# Altium PCB PCB_Master_Traffic_Light.PcbDoc
Units mil, origin at the board's own origin, x right, y up, seen from the top; angles counter-clockwise.
Board outline 5500 x 4020 mil, 2 copper layers (Top Layer, Bottom Layer); 46 components, 52 nets, 237 pads, 98 vias.
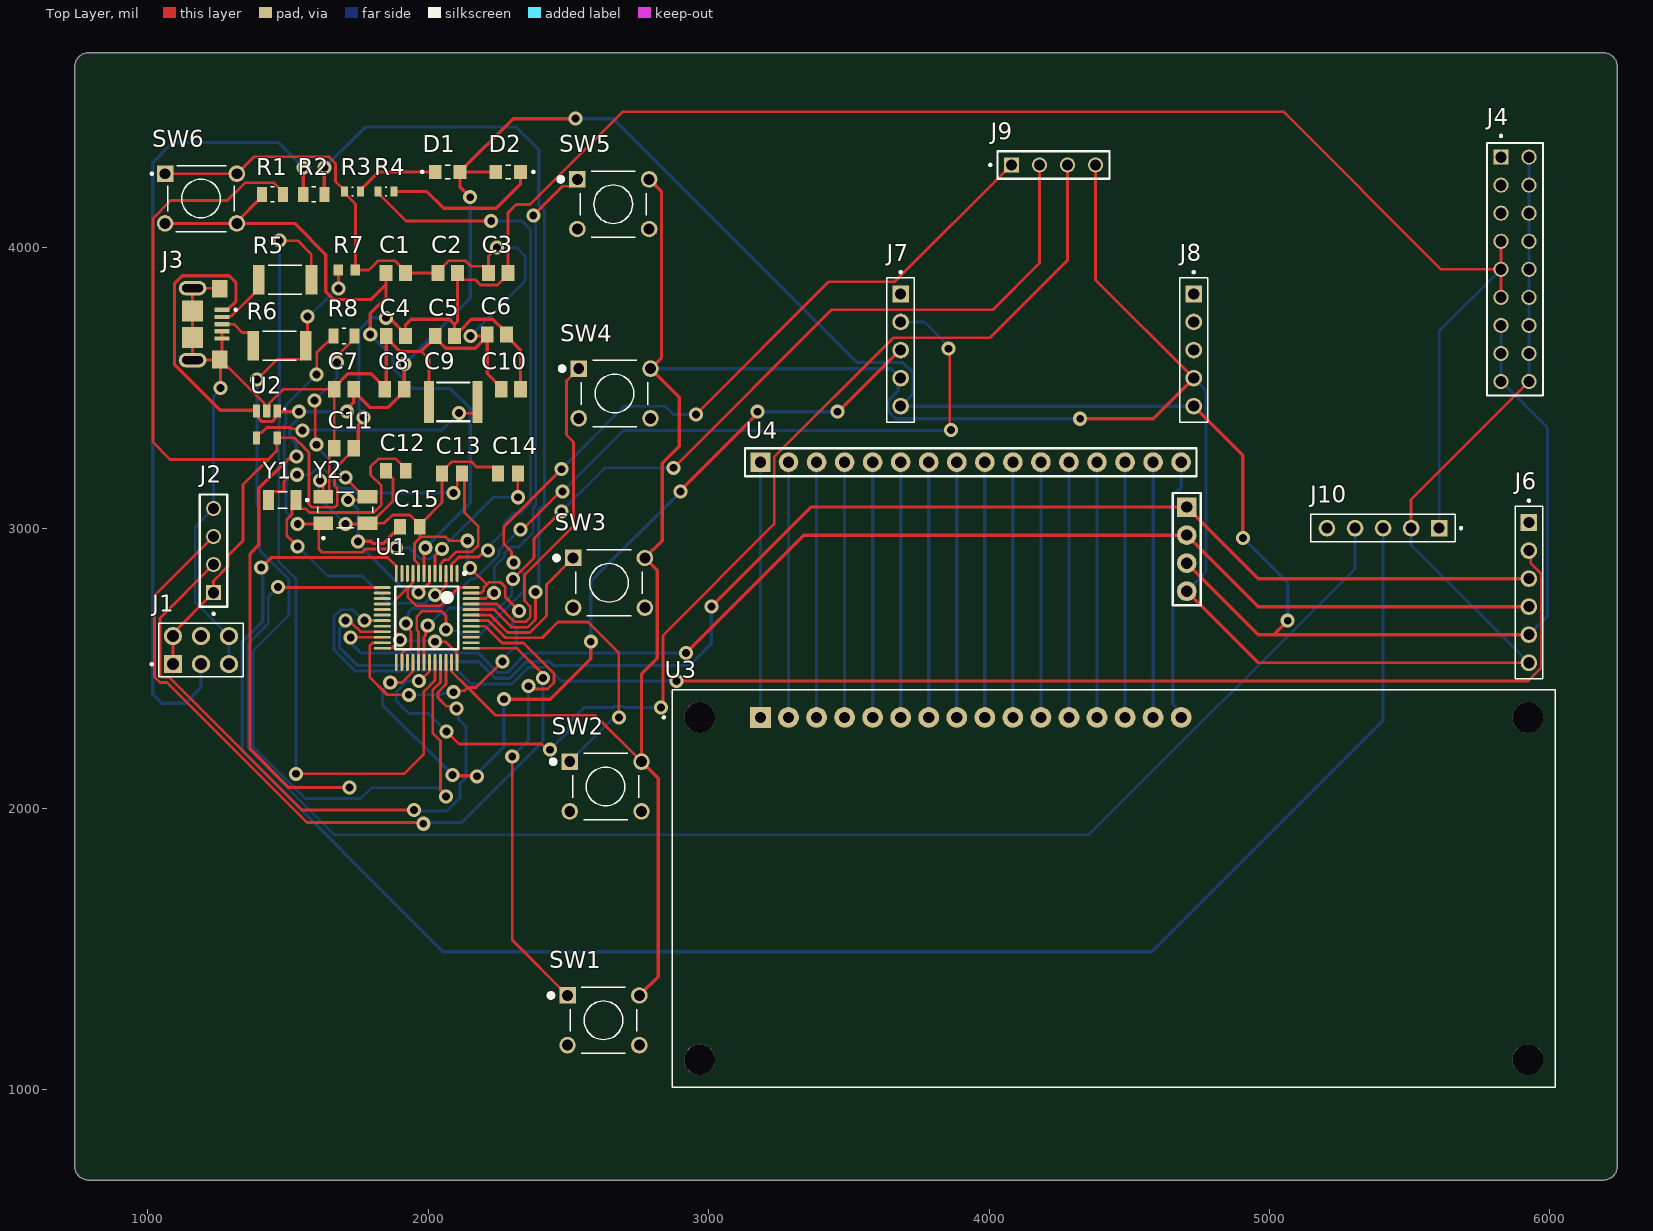
[diagram p0: Top Layer view]
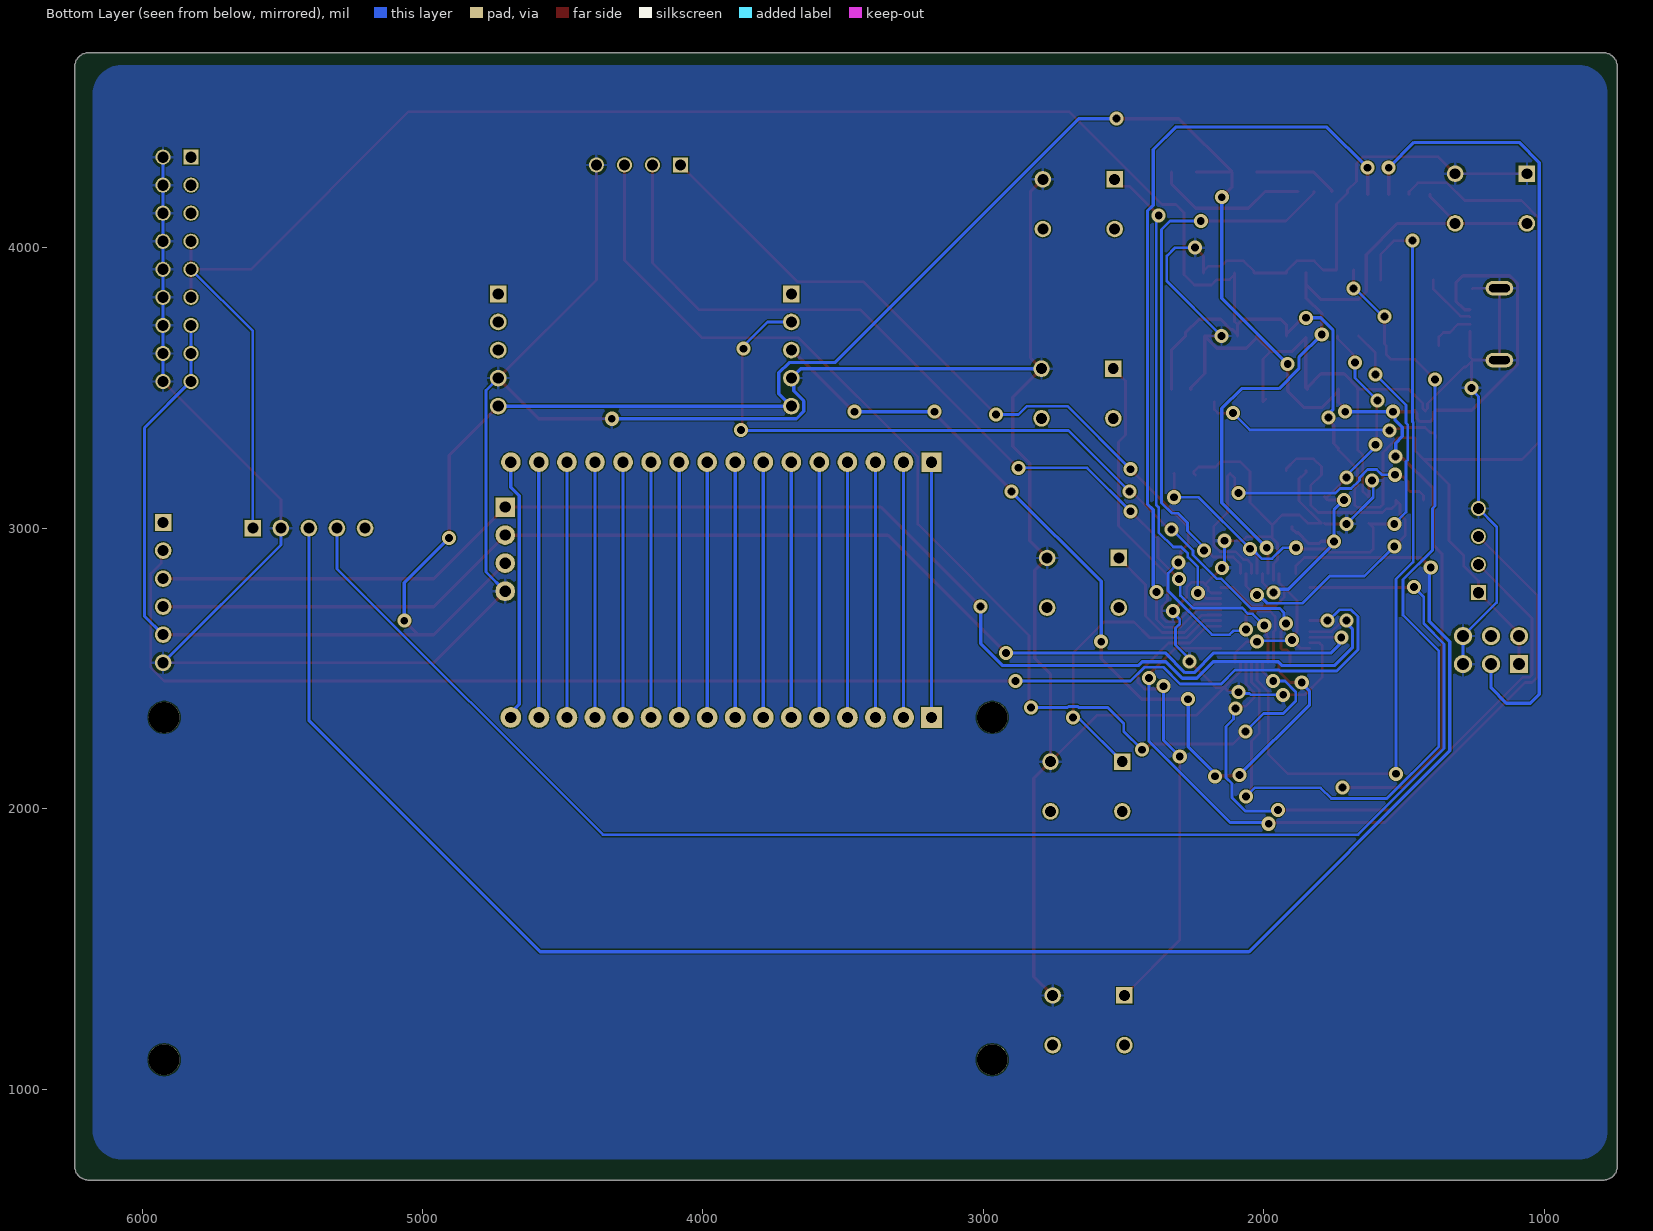
[diagram p1: Bottom Layer view, seen from below]

## Layer stack, top to bottom
Top Solder: solder mask 0.4, Solder Resist, Dk 3.5
Top Layer: signal copper 1.4
Dielectric 1: dielectric 12.6, FR-4, Dk 4.8
Bottom Layer: signal copper 1.4
Bottom Solder: solder mask 0.4, Solder Resist, Dk 3.5

## Board outline
740,725 740,4645 cw(c790,4645) 790,4695 6190,4695 cw(c6190,4645) 6240,4645 6240,725 cw(c6190,725) 6190,675 790,675 cw(c790,725)

## Design rules (kind name [scope] priority, off if disabled: settings)
Clearance [All] p1: gap=3.94 ignorepadtopadclearanceinfootprint=FALSE
PolygonConnect [All] p1: connectstyle=Relief reliefconductorwidth=10 reliefentries=4 polygonreliefangle="90 Angle" airgapwidth=10
RoutingVias [All] p1: holewidth=28 width=50 viastyle="Through Hole" minholewidth=28 minwidth=50 maxholewidth=28 maxwidth=50
SolderMaskExpansion [All] p1: expansion=4 istentingtop=FALSE
SupplyNets "Schematic Supply Nets" [InNet('GND')] p1: voltage=0.000
Width [All] p1: maxlimit=11.81 minlimit=9.06 preferedwidth=9.84 minimp=50.000000 maximp=50.000000 favimp=50.000000
30 further rules are at their usual default settings.

## Components (designator, comment, footprint, x,y, rotation, side; value= is the part's Value field where it differs from the comment)
C1 "1u" CAPC2012X145N 1884.65,3910 r0 top
C2 "100n" CAPC2012X100N#1 2070,3910 r0 top
C3 "100n" CAPC2012X100N#1 2250,3910 r0 top
C4 "100n" CAPC2012X100N#1 1885,3685 r0 top
C5 "100n" CAPC2012X100N#1 2059.65,3685 r0 top
C6 "100n" CAPC2012X100N#1 2245,3690 r0 top
C7 "1u" CAPC2012X145N 1700,3495 r0 top
C8 "100n" CAPC2012X100N#1 1880,3495 r0 top
C9 "22nF" WCAP-CSGP_1812_L4.5W3.2H1.25 2090,3450 r0 top
C10 "10u" CAPC2012X100N#1 2295,3495 r0 top
C11 "100n" CAPC2012X100N#1 1700,3285 r0 top
C12 "20p" CAPC2012X100N#2 1885,3205 r0 top
C13 "20p" CAPC2012X100N#2 2085,3195 r0 top
C14 "20p" CAPC2012X100N#2 2285,3195 r0 top
C15 "20p" CAPC2012X100N#2 1935,3005 r180 top
D1 "7012X1" LED_7012X1 2069.29,4270 r0 top
D2 "7012X1" LED_7012X1 2285,4270 r180 top
J1 "67997-106HLF" AMPHENOL_67997-106HLF 1190,2565 r0 top
J2 "HTSW-104-23-SM-S" SAMTEC_HTSW-104-23-SM-S 1235,2920 r270 top
J3 "2013499-1" TE_2013499-1 1160,3727.24 r270 top
J4 "ASM1117" SAMTEC_MTSW-109-13-G-D-905 5825.52,4322.82 r270 top
J6 "DS3231" HARWIN_M20-7820646 5925,2770 r90 top
J7 "LED1" HARWIN_M20-7820546 3685,3635 r90 top
J8 "LED2" HARWIN_M20-7820546 4730,3635 r90 top
J9 "Traffic Light" SAMTEC_HTSW-104-23-SM-S 4230,4295 r180 top
J10 "HC12" HARWIN_M20-7820546 5405,3000 r0 top
R1 "10k" RESC2012X60N 1445,4190 r180 top
R2 "100k" RESC2012X60N 1592.6,4190 r180 top
R3 "ERJPA3F5100V" RES_ERJPA3F5100V 1730,4200 r180 top
R4 "ERJPA3F5100V" RES_ERJPA3F5100V 1850,4200 r180 top
R5 "20R" RESC5025X120N 1490,3885 r180 top
R6 "20R" RESC5025X120N 1470,3650 r180 top
R7 "4k7" RESC1608X55N 1710,3920 r180 top
R8 "1M" RESC2012X60N 1700,3685 r180 top
SW1 "Button - Normal Mode" SW_FSM8JH 2625,1245 r0 top
SW2 "Button - Heavy Mode" SW_FSM8JH 2632.95,2078.58 r0 top
SW3 "Button - Night Mode" SW_FSM8JH 2645,2805 r0 top
SW4 "Button - Control Mode" SW_FSM8JH 2665,3480 r0 top
SW5 "Button - Control State" SW_FSM8JH 2660,4155 r0 top
SW6 "1825910-6" SW_1825910-6-4 1190,4175 r0 top
U1 "STM32F103C8T6" STM-LQFP48_L 1995,2680 r270 top
U2 "RT9193-33GB" SOT94P279X129-5N 1425,3370 r270 top
U3 "LCD-16X2" MODULE_LCD-16X2 4444.84,1714.76 r0 top
U4 "I2C" PCF8574 3185,3235 r0 top
Y1 "32.768K" XTAL_NX3215SA-32.768K-STD-MUA-14 1480,3100 r180 top
Y2 "8MHz" XTAL_ABM3B-8.000MHZ-10-1-U-T 1705,3065 r90 top

## Footprints (in the part's own frame and the unit in brackets; to place one, negate y for a bottom-side part, rotate by r counter-clockwise, add the part's x,y. Pads: shape width x height; smd on the part's side, far side on the other; paste and mask are expansions set on the pad)
AMPHENOL_67997-106HLF [mm]
  rect 1.65x1.65 hole 1.1: 01(-2.54,-1.27)
  round 1.65 hole 1.1: 02(-2.54,1.27) 03(0,-1.27) 04(0,1.27) 05(2.54,-1.27) 06(2.54,1.27)
  silkscreen extent -4.56,-2.41 3.81,2.41, body extent -3.81,-2.41 3.81,2.41, height 8.38
CAPC2012X100N#1 [mm]
  rect 1.15x1.47 smd: 1(-0.88,0) 2(0.88,0)
  body extent -1,-0.63 1,0.63, height 1
CAPC2012X100N#2 [mm]
  rect 1.08x1.42 smd: 1(-0.895,0) 2(0.895,0)
  body extent -1,-0.63 1,0.63, height 1
CAPC2012X145N [mm]
  rect 1.15x1.47 smd: 1(-0.88,0) 2(0.88,0)
  body extent -1,-0.63 1,0.63, height 1.45
HARWIN_M20-7820546 [mm]
  rect 1.508x1.508 / inner round 1.508 / far side rect 1.508x1.508 hole 1: 1(5.08,0)
  round 1.508 hole 1: 2(2.54,0) 3(0,0) 4(-2.54,0) 5(-5.08,0)
  silkscreen extent -6.55,-1.25 7.16,1.25
HARWIN_M20-7820646 [mm]
  rect 1.508x1.508 / inner round 1.508 / far side rect 1.508x1.508 hole 1: 1(6.35,0)
  round 1.508 hole 1: 2(3.81,0) 3(1.27,0) 4(-1.27,0) 5(-3.81,0) 6(-6.35,0)
  silkscreen extent -7.82,-1.25 8.43,1.25
LED_7012X1 [mm]
  rect 1.15x1.3 smd: A(1.125,0) C(-1.125,0)
  silkscreen extent -2.4,-0.63 0.23,0.63, body extent -0.62,-1 0.62,1, height 0.73
MODULE_LCD-16X2 [mm]
  rect 1.88x1.88 / inner round 1.88 / far side rect 1.88x1.88 hole 1.016: 1(-32,15.5)
  round 1.88 hole 1.016: 2(-29.46,15.5) 3(-26.92,15.5) 4(-24.38,15.5) 5(-21.84,15.5) 6(-19.3,15.5) 7(-16.76,15.5) 8(-14.22,15.5) 9(-11.68,15.5) 10(-9.14,15.5) 11(-6.6,15.5) 12(-4.06,15.5) 13(-1.52,15.5) 14(1.02,15.5) 15(3.56,15.5) 16(6.1,15.5)
  round 2.8 hole 2.8 unplated: ""(-37.5,-15.5) ""(-37.5,15.5) ""(37.5,-15.5) ""(37.5,15.5)
  silkscreen extent -40.85,-18 40,18, body extent -40,-18 40,18, height 10.2
PCF8574 [mil]
  rect 70x70 hole 40: 1(0,0) 17(1520,-160)
  round 70 hole 40: 2(100,0) 3(200,0) 4(300,0) 5(400,0) 6(500,0) 7(600,0) 8(700,0) 9(800,0) 10(900,0) 11(1000,0) 12(1100,0) 13(1200,0) 14(1300,0) 15(1400,0) 16(1500,0) 18(1520,-260) 19(1520,-360) 20(1520,-460)
  silkscreen extent -55,-510 1570,50, body extent -62,-659 1572,50, height 330
RES_ERJPA3F5100V [mm]
  rect 0.65x0.9 smd: 1(-0.725,0) 2(0.725,0)
  silkscreen extent -0.08,-0.4 0.08,0.4, body extent -0.8,-0.4 0.8,0.4, height 0.45
RESC1608X55N [mm]
  rect 0.87x0.97 smd: 1(-0.78,0) 2(0.78,0)
  body extent -0.8,-0.4 0.8,0.4, height 0.55
RESC2012X60N [mm]
  rect 0.92x1.38 smd: 1(-0.955,0) 2(0.955,0)
  silkscreen extent -0.17,-0.68 0.17,0.68, body extent -1,-0.63 1,0.63, height 0.6
RESC5025X120N [mm]
  rect 1.07x2.67 smd: 1(-2.38,0) 2(2.38,0)
  silkscreen extent -1.52,-1.32 1.52,1.32
SAMTEC_HTSW-104-23-SM-S [mm]
  rect 1.37x1.37 / inner round 1.37 / far side rect 1.37x1.37 hole 1.02: 01(3.81,0)
  round 1.37 hole 1.02: 02(1.27,0) 03(-1.27,0) 04(-3.81,0)
  silkscreen extent -5.08,-1.24 5.83,1.24
SAMTEC_MTSW-109-13-G-D-905 [mm]
  rect 1.37x1.37 hole 1.02: 01(0,0)
  round 1.37 hole 1.02: 02(0,2.54) 03(2.54,0) 04(2.54,2.54) 05(5.08,0) 06(5.08,2.54) 07(7.62,0) 08(7.62,2.54) 09(10.16,0) 10(10.16,2.54) 11(12.7,0) 12(12.7,2.54) 13(15.24,0) 14(15.24,2.54) 15(17.78,0) 16(17.78,2.54) 17(20.32,0) 18(20.32,2.54)
  silkscreen extent -2.02,-1.27 21.59,3.81
SOT94P279X129-5N [mm]
  rrect12% 1.17x0.67 smd: 1(-1.22,0.94) 2(-1.22,0) 3(-1.22,-0.94) 4(1.22,-0.94) 5(1.22,0.94)
  silkscreen extent -1.47,1.53 -1.33,1.67, body extent -1.4,-1.45 1.4,1.45, height 1.3
STM-LQFP48_L [mm] "QFP, 48-Leads, Body 7x7mm, Pitch 0.5mm, IPC High Density"
  oval 1.55x0.25 smd: 1(-4.025,2.75) 2(-4.025,2.25) 3(-4.025,1.75) 4(-4.025,1.25) 5(-4.025,0.75) 6(-4.025,0.25) 7(-4.025,-0.25) 8(-4.025,-0.75) 9(-4.025,-1.25) 10(-4.025,-1.75) 11(-4.025,-2.25) 12(-4.025,-2.75) 25(4.025,-2.75) 26(4.025,-2.25) 27(4.025,-1.75) 28(4.025,-1.25) 29(4.025,-0.75) 30(4.025,-0.25) 31(4.025,0.25) 32(4.025,0.75) 33(4.025,1.25) 34(4.025,1.75) 35(4.025,2.25) 36(4.025,2.75)
  oval 0.25x1.55 smd: 13(-2.75,-4.025) 14(-2.25,-4.025) 15(-1.75,-4.025) 16(-1.25,-4.025) 17(-0.75,-4.025) 18(-0.25,-4.025) 19(0.25,-4.025) 20(0.75,-4.025) 21(1.25,-4.025) 22(1.75,-4.025) 23(2.25,-4.025) 24(2.75,-4.025) 37(2.75,4.025) 38(2.25,4.025) 39(1.75,4.025) 40(1.25,4.025) 41(0.75,4.025) 42(0.25,4.025) 43(-0.25,4.025) 44(-0.75,4.025) 45(-1.25,4.025) 46(-1.75,4.025) 47(-2.25,4.025) 48(-2.75,4.025)
  silkscreen extent -4.15,-2.85 2.85,3.55, body extent -3.5,-3.5 3.5,3.5, height 1.6
SW_1825910-6-4 [mm]
  rect 1.498x1.498 / inner round 1.498 / far side rect 1.498x1.498 hole 0.99: 1(-3.25,2.25)
  round 1.498 hole 0.99: 2(3.25,2.25) 3(-3.25,-2.25) 4(3.25,-2.25)
  silkscreen extent -4.54,-3 3,3, body extent -3,-3.9 3,3.9, height 5.01
SW_FSM8JH [mm]
  rect 1.498x1.498 / inner round 1.498 / far side rect 1.498x1.498 hole 0.99: 1(-3.25,2.25)
  round 1.498 hole 0.99: 2(-3.25,-2.25) 3(3.25,2.25) 4(3.25,-2.25)
  silkscreen extent -4.95,-3 3,3, body extent -3,-3.95 3,3.95, height 9.5
TE_2013499-1 [mm]
  rect 0.4x1.35 smd: 1(-1.3,2.675) 2(-0.65,2.675) 3(0,2.675) 4(0.65,2.675) 5(1.3,2.675)
  rect 1.6x1.4 smd: SH1(-3.2,2.45) SH4(3.2,2.45)
  rect 1.9x1.9 smd: SH2(-1.2,0) SH3(1.2,0)
  oval 1.31x2.5 hole 0.71 slot 1.9 at 90 deg: SH5(3.255,0) SH6(-3.255,0)
  silkscreen extent -1.4,3.8 -1.2,4, body extent -4,-2.49 4,3.11, height 2.76
WCAP-CSGP_1812_L4.5W3.2H1.25 [mm] "Ceramic Capacitors, body 4.5x3.2mm"
  rect 0.9x3.8 smd: 1(-2.2,0) 2(2.2,0)
  silkscreen extent -1.45,-1.75 1.45,1.75, body extent -2.25,-1.6 2.25,1.6, height 1.25
XTAL_ABM3B-8.000MHZ-10-1-U-T [mm]
  rect 1.2x1.8 smd: 1(-1.2,2) 2(-1.2,-2) 3(1.2,-2) 4(1.2,2)
  silkscreen extent -2.65,-2.5 1.6,2.5, body extent -1.58,-2.5 1.6,2.5, height 1.1
XTAL_NX3215SA-32.768K-STD-MUA-14 [mm]
  rect 1x1.8 smd: 1(-1.25,0) 2(1.25,0)
  silkscreen extent -2.35,-0.75 0.43,0.75

## Part data
C1 C7: library part C2012X5R1E105K125AA, "1 ÂµF Â±10% 25V Ceramic Capacitor X5R 0805 (2012 Metric)", Package="2012 TDK", Check_prices=https://www.snapeda.com/parts/C2012X5R1E105K125AA/TDK/view-part/?ref=eda, Digi-Key_Part_Number=445-1419-2-ND, MF=TDK, MP=C2012X5R1E105K125AA, SnapEDA_Link=https://www.snapeda.com/parts/C2012X5R1E105K125AA/TDK/view-part/?ref=snap
C2 C3 C4 C5 C6 C8 C11: library part C2012X7R1H104K085AA, "0.1 ÂµF Â±10% 50V Ceramic Capacitor X7R 0805 (2012 Metric)", Package="2012 TDK", Check_prices=https://www.snapeda.com/parts/C2012X7R1H104K085AA/TDK/view-part/?ref=eda, Digi-Key_Part_Number=445-7534-1-ND, MF=TDK, MP=C2012X7R1H104K085AA, Purchase-URL=https://pricing.snapeda.com/search/part/C2012X7R1H104K085AA/?ref=eda, SnapEDA_Link=https://www.snapeda.com/parts/C2012X7R1H104K085AA/TDK/view-part/?ref=snap
C9: library part 885012010015, "WCAP-CSGP Multilayer Ceramic Chip Capacitor, General Purpose, size 1812, NP0, 22nF, 50V", Capacitance Tolerance=+/-5%, Case/Size Code=1812, Insulation Resistance=10GΩ, Manufacturer="Wurth Elektronik", Max Operating Temperature=125°C, Min Operating Temperature=-55°C, Rated Voltage (DC)=50V, Capacitance=22nF, Category="Multilayer Ceramic Chip Capacitors", Ceramic Type=NP0, ComponentLink1Description="Website Link", ComponentLink1URL=https://www.we-online.com/redexpert/article/885012010015?ad, ComponentLink2Description="Datasheet Link", ComponentLink2URL=https://www.we-online.com/redexpert/spec/885012010015?ad, Height=1.25mm, Length=4.5mm, Manufacturer Part Number=885012010015, Match Code=WCAP-CSGP, Mount="Surface Mount", Packaging="Tape and Reel", Q Factor=1000, Technical Reference=NP01812223J050DFCT10000, Width=3.2mm
C10: library part C2012X5R1C106M085AC, "10ÂµF Â±20% 16V Ceramic Capacitor X5R 0805 (2012 Metric)", Package="2012 TDK", Availability="In Stock", Check_prices=https://www.snapeda.com/parts/C2012X5R1C106M085AC/TDK/view-part/?ref=eda, MF=TDK, MP=C2012X5R1C106M085AC, Price=None, Purchase-URL=https://pricing.snapeda.com/search/part/C2012X5R1C106M085AC/?ref=eda, SnapEDA_Link=https://www.snapeda.com/parts/C2012X5R1C106M085AC/TDK/view-part/?ref=snap
C12 C13 C14 C15: library part GQM2195C2E200JB12D, "SMD Capacitor C0G(EIA) with Capacitance: 20pF Tol. 5%. Rated Voltage: 250Vdc", Package="2012 Murata", Availability=Warning, MF=Murata, MP=GQM2195C2E200JB12D, Price=None, Purchase-URL=https://pricing.snapeda.com/search/part/GQM2195C2E200JB12D/?ref=eda, SnapEDA_Link=https://www.snapeda.com/parts/GQM2195C2E200JB12D/Murata/view-part/4378826/?ref=snap
D1 D2: "Red - LED Indication - Discrete 1.7V 0805 (2012 Metric)", Package="0805 Visual Communications", Availability="In Stock", Check_prices=https://www.snapeda.com/parts/7012X1/Visual+Communications/view-part/?ref=eda, MF=VCC, MP=7012X1, Price=None, Purchase-URL=https://pricing.snapeda.com/search/part/7012X1/?ref=eda, SnapEDA_Link=https://www.snapeda.com/parts/7012X1/Visual+Communications/view-part/?ref=snap
J1: "BergStikÂ®, Board to Board connector, Unshrouded vertical header, Through Hole, Double Row, 6 Positions, 2.54 mm (0.100in) Pitch", Package=None, Availability="In Stock", Check_prices=https://www.snapeda.com/parts/67997-106HLF/Amphenol+FCI/view-part/?ref=eda, MF="Amphenol ICC", MP=67997-106HLF, Price=None, Purchase-URL=https://pricing.snapeda.com/search/part/67997-106HLF/?ref=eda, SnapEDA_Link=https://www.snapeda.com/parts/67997-106HLF/Amphenol+FCI/view-part/?ref=snap
J2: "HEADER, 4 CONTACTS, 1 ROW, THROUGH HOLE, 2.54 MM; Connector Systems:Board-to-Board; Pitch Spacing:2.54mm; No. of Rows:1Rows; No. of Contacts:4Contacts; Contact Termination Type:Through Hole; Product Range:HTSW Series; Gender:Header RoHS Compliant: Yes", Package=None, Availability="In Stock", Check_prices=https://www.snapeda.com/parts/HTSW10423SMS/Samtec/view-part/?ref=eda, MF=Samtec, MP=HTSW10423SMS, Price=None, Purchase-URL=https://pricing.snapeda.com/search/part/HTSW10423SMS/?ref=eda, SnapEDA_Link=https://www.snapeda.com/parts/HTSW10423SMS/Samtec/view-part/?ref=snap
J3: Package=None, Availability=Unavailable, MP=2013499-1, Price=None
J4: library part MTSW-109-13-G-D-905, Package=None, Availability=Unavailable, MP=MTSW-109-13-G-D-905, Price=None
J6: library part M20-7820646, Package=None, Availability=Unavailable, MP=M20-7820646, Price=None
J7 J8 J10: library part M20-7820546, Package=None, Availability=Unavailable, MP=M20-7820546, Price=None
J9: library part HTSW-104-23-SM-S, "HEADER, 4 CONTACTS, 1 ROW, THROUGH HOLE, 2.54 MM; Connector Systems:Board-to-Board; Pitch Spacing:2.54mm; No. of Rows:1Rows; No. of Contacts:4Contacts; Contact Termination Type:Through Hole; Product Range:HTSW Series; Gender:Header RoHS Compliant: Yes", Package=None, Availability="In Stock", Check_prices=https://www.snapeda.com/parts/HTSW10423SMS/Samtec/view-part/?ref=eda, MF=Samtec, MP=HTSW10423SMS, Price=None, Purchase-URL=https://pricing.snapeda.com/search/part/HTSW10423SMS/?ref=eda, SnapEDA_Link=https://www.snapeda.com/parts/HTSW10423SMS/Samtec/view-part/?ref=snap
R1: library part RC0805FR-0710KL, "10 kOhms Â±1% 0.125W, 1/8W Chip Resistor 0805 (2012 Metric) Moisture Resistant Thick Film", Package="2012 Rohm Semiconductor", Availability="In Stock", Check_prices=https://www.snapeda.com/parts/RC0805FR-0710KL/Yageo/view-part/?ref=eda, MF=Yageo, MP=RC0805FR-0710KL, Price=None, Purchase-URL=https://pricing.snapeda.com/search/part/RC0805FR-0710KL/?ref=eda, SnapEDA_Link=https://www.snapeda.com/parts/RC0805FR-0710KL/Yageo/view-part/?ref=snap
R2: library part RC0805FR-07100KL, "100 kOhms Â±1% 0.125W, 1/8W Chip Resistor 0805 (2012 Metric) Moisture Resistant Thick Film", Package="2012 Yageo", Check_prices=https://www.snapeda.com/parts/RC0805FR-07100KL/Yageo/view-part/?ref=eda, MF=Yageo, MP=RC0805FR-07100KL, SnapEDA_Link=https://www.snapeda.com/parts/RC0805FR-07100KL/Yageo/view-part/?ref=snap
R3 R4: "RES, THICK FILM, 510R, 1%, 0.25W, 0603", Package="1608-2 Panasonic", Check_prices=https://www.snapeda.com/parts/ERJ-PA3F5100V/Panasonic/view-part/?ref=eda, MF=Panasonic, MP=ERJ-PA3F5100V, SnapEDA_Link=https://www.snapeda.com/parts/ERJ-PA3F5100V/Panasonic/view-part/?ref=snap
R5 R6: library part 3-2176397-2, Package=None, Availability=Unavailable, MP=3-2176397-2, Price=None
R7: library part CRG0603F4K7, "Resistor, Thick Film, Res 4.7 Kilohms, Pwr-Rtg 0.1 W, Tol 1%, SMT, 0603", Package=0603, Power_Rating=".1 W", Resistance=4.7K, Tolerance=1%, Voltage_Rating="50 V", Check_prices=https://www.snapeda.com/parts/CRG0603F4K7/TE+Connectivity+Passive+Product/view-part/?ref=eda, EU_RoHS_Compliance="Compliant with Exemptions", MF="TE Connectivity", MP=CRG0603F4K7, SnapEDA_Link=https://www.snapeda.com/parts/CRG0603F4K7/TE+Connectivity+Passive+Product/view-part/?ref=snap
R8: library part RC0805FR-071ML, "1 MOhms Â±1% 0.125W, 1/8W Chip Resistor 0805 (2012 Metric) Moisture Resistant Thick Film", Package="2012 Yageo", Check_prices=https://www.snapeda.com/parts/RC0805FR-071ML/Yageo/view-part/?ref=eda, MF=Yageo, MP=RC0805FR-071ML, SnapEDA_Link=https://www.snapeda.com/parts/RC0805FR-071ML/Yageo/view-part/?ref=snap
SW1 SW2 SW3 SW4 SW5: library part FSM8JH, "Tactile Switch SPST-NO Top Actuated Through Hole", Package=None, Availability="In Stock", Check_prices=https://www.snapeda.com/parts/FSM8JH/TE+Connectivity+ALCOSWITCH+Switches/view-part/?ref=eda, MF="TE Connectivity", MP=FSM8JH, Price=None, SnapEDA_Link=https://www.snapeda.com/parts/FSM8JH/TE+Connectivity+ALCOSWITCH+Switches/view-part/?ref=snap
SW6: "Switch Push Button OFF (ON) SPST Round Button 0.05A 24VDC Momentary Contact PC Pins Thru-Hole", Package=None, Check_prices=https://www.snapeda.com/parts/1825910-6/TE+Connectivity+ALCOSWITCH+Switches/view-part/?ref=eda, Digi-Key_Part_Number=450-1650-ND, MF="TE Connectivity", MP=1825910-6, Purchase-URL=https://pricing.snapeda.com/search/part/1825910-6/?ref=eda, SnapEDA_Link=https://www.snapeda.com/parts/1825910-6/TE+Connectivity+ALCOSWITCH+Switches/view-part/?ref=snap
U1: library part CMP-0237-00215-3, "ARM Cortex-M3 32-bit MCU, 64 KB Flash, 20 KB Internal RAM, 37 I/Os, 48-pin LQFP, -40 to 85 degC, Tray", I/Os (High Current)=37, Operating Frequency(F) (Processor speed) (MHz)=72, Supply Voltage(Vcc) min (V)=2, A/D Converter="2x12-bit (10 Channel)", ComponentLink1Description="Manufacturer URL", ComponentLink1URL=http://www.st.com/web/en/home.html, ComponentLink2Description=Datasheet, ComponentLink2URL=http://www.st.com/st-web-ui/static/active/en/resource/technical/document/datasheet/CD00161566.pdf, ComponentLink3Description="Package Specification", ComponentLink3URL=http://www.st.com/st-web-ui/static/active/en/resource/technical/document/datasheet/DM00058181.pdf, Core="ARM Cortex-M3", DatasheetVersion="Rev. 16", FLASH Size (Prog) (kB)=64, Internal RAM Size (kB)=20, Mounting Technology="Surface Mount", PackageDescription="48-Pin Low Profile Quad Flat Package, 7 x 7 mm Body, 0.5 mm Pitch", PackageReference=LQFP48, PackageVersion="Rev. 6, 06/2013", Packing=Tray, PartNumber=STM32F103C8T6
U2: "Linear Voltage Regulator IC Positive Fixed 1 Output 300mA TSOT-23-5", Package="SOT-23-5 Richtek", Check_prices=https://www.snapeda.com/parts/RT9193-33GB/Richtek+USA+Inc./view-part/?ref=eda, Digi-Key_Part_Number=1028-1014-2-ND, MF="Richtek USA", MP=RT9193-33GB, Purchase-URL=https://pricing.snapeda.com/search/part/RT9193-33GB/?ref=eda, SnapEDA_Link=https://www.snapeda.com/parts/RT9193-33GB/Richtek+USA+Inc./view-part/?ref=snap
U3: "Display Development Tools 16x2 Black on Green Char LCD w Backlight", Package=None, Check_prices=https://www.snapeda.com/parts/LCD-16X2/Gravitech/view-part/?ref=eda, MF=Gravitech, MP=LCD-16X2, SnapEDA_Link=https://www.snapeda.com/parts/LCD-16X2/Gravitech/view-part/?ref=snap
U4: library part PCF8574
Y1: library part NX3215SA-32.768K-STD-MUA-14, "32.768kHz Â±20ppm Crystal 6pF 70 kOhms 2-SMD, No Lead  MANUFACTURER: NIHON DEMPA KOGYO", Package=None, Availability=Unavailable, MP=NX3215SA-32.768K-STD-MUA-14, Price=None
Y2: library part ABM3B-8.000MHZ-10-1-U-T, "8 MHz Â±10ppm Crystal 10pF 200 Ohms 4-SMD, No Lead", Package="SMD-4 Abracon LLC", Check_prices=https://www.snapeda.com/parts/ABM3B-8.000MHZ-10-1-U-T/Abracon/view-part/?ref=eda, MF=Abracon, MP=ABM3B-8.000MHZ-10-1-U-T, SnapEDA_Link=https://www.snapeda.com/parts/ABM3B-8.000MHZ-10-1-U-T/Abracon/view-part/?ref=snap

## Via types
v1: diameter 50, hole 28, Top Layer to Bottom Layer, 98 vias

## Nets (pads, with @x,y where several pads share a name; then routed paths per layer and width w, separated by ;. In a path a pad name is that pad's centre, name@x,y a point inside that pad or via, vN(x,y) a via of type N, cw(c..) or ccw(c..) an arc to the next point about the centre after c; other vN are vias at no path point)
3V3: U1.9 U1.24 U1.36 U1.48 | length 901.3
  Top Layer w9.84: U1.24 1870.31,2571.73 v1(1899.84,2601.26) 1899.84,2612.13 1881.72,2630.25 1881.72,2741.77 1927.13,2787.18 ; U1.9 1945.79,2805.83 1927.13,2787.18 ; v1(2024.04,2595) 2062.43,2595 2103.27,2554.17 U1.36 ; U1.48 2108.19,2788.27 2042.8,2722.87 1959.15,2722.87 1927.13,2754.89 1927.13,2787.18
  Bottom Layer w9.84: v1(1899.84,2601.26) 1902.97,2598.13 2020.91,2598.13 v1(2024.04,2595)
A: U3.15 U4.15 | length 910
  Bottom Layer w11.81: U3.15 U4.15
BOOT0: R2.1 U1.44 | length 2917.3
  Top Layer w9.84: U1.44 2234.31,2709.53 2296.89,2646.95 2355.64,2646.95 2382.71,2674.02 v1(2382.71,2772.48)
  Top Layer w11.81: v1(1630,4285) 1630,4190.2 R2.1
  Bottom Layer w11.81: v1(1630,4285) 1775,4430 2315,4430 2395,4350 2395,4151.51 2414.96,4131.55 2414.96,3085.12 2395,3065.16 2395,2795.11 2382.71,2782.82 v1(2382.71,2772.48)
DB0: U3.7 U4.7 | length 910
  Bottom Layer w11.81: U3.7 U4.7
DB1: U3.8 U4.8 | length 910
  Bottom Layer w11.81: U3.8 U4.8
DB2: U3.9 U4.9 | length 910
  Bottom Layer w11.81: U3.9 U4.9
DB3: U3.10 U4.10 | length 910
  Bottom Layer w11.81: U3.10 U4.10
DB4: U3.11 U4.11 | length 910
  Bottom Layer w11.81: U3.11 U4.11
DB5: U3.12 U4.12 | length 910
  Bottom Layer w11.81: U3.12 U4.12
DB6: U3.13 U4.13 | length 910
  Bottom Layer w11.81: U3.13 U4.13
DB7: U3.14 U4.14 | length 910
  Bottom Layer w11.81: U3.14 U4.14
E: U3.6 U4.6 | length 910
  Bottom Layer w11.81: U3.6 U4.6
GND: C1.2 C2.1 C3.1 C4.1 C5.1 C6.1 C7.1 C8.1 C9.1 C10.1 C11.1 C12.1 C13.1 C14.1 C15.1 J1.05 J1.06 J2.04 J3.4 J3.5 J3.SH1 J3.SH2 J3.SH3 J3.SH4 J3.SH5 J3.SH6 J4.02 J4.04 J4.06 J4.08 J4.10 J4.12 J4.14 J4.16 J4.18 J6.6 J7.4 J8.4 J9.04 J10.2 R3.2 R7.1 SW1.3 SW2.3 SW3.3 SW4.3 SW5.3 SW6.1 SW6.2 U1.8 U1.23 U1.35 U1.47 U2.2 U4.20 Y2.2 Y2.4 | length 20530.7
  Top Layer w9.84: SW6.1 SW6.2 1378.35,4323.98 1646.14,4323.98 1669.86,4300.26 1669.86,4236.51 1701.46,4204.92 R3.2 1701.46,4195.08 1740.71,4155.83 R7.1 1788.66,3920 1821.57,3952.91 1882.68,3952.91 1919.29,3916.3 C1.2 C2.1 2035.35,3916.3 2071.97,3952.91 2133.07,3952.91 2151.97,3934.02 2197.64,3934.02 C3.1@2215.35,3916.3 ; J3.SH1 1254.29,3855.39 J3.SH6 J3.SH2 J3.SH3 J3.SH5 1254.29,3599.09 J3.SH4 ; v1(1260,3500) J3.SH4@1260,3593.78 ; J3.4 J3.5 1265.32,3610.12 J3.SH4 ; v1(1613.88,3170) 1613.88,3159.13 1626.26,3146.75 Y2.4 ; Y2.4@1628.43,3112.24 1647.13,3130.94 1647.13,3260.47 1665.35,3278.7 C11.1 C7.1 1483.92,3495 1433.27,3444.35 1433.27,3426.3 U2.2 1416.73,3426.3 1416.73,3444.35 1286.4,3574.68 1279.09,3574.68 J3.SH4@1260,3593.78 ; v1(1705,3015) 1780.98,3015 Y2.2 ; U1.23 1802.4,2591.42 1792.05,2581.07 1792.05,2467.83 1854.14,2405.74 v1(1930.99,2405.74) ; C12.1 1849.76,3198.31 1866.1,3181.97 1869.23,3181.97 1875,3176.2 1875,3097.2 1795.55,3017.76 1843.54,3017.76 1872.71,3046.93 1935,3046.93 1970.24,3011.69 2049.76,3091.22 C13.1 2049.76,3201.69 2085,3236.93 2153.86,3236.93 2172.76,3218.03 2233.43,3218.03 2249.76,3201.69 C14.1 C14.1@2243.98,3189.21 ; U1.8@1965.47,2813.56 U1.8 1965.47,2871.5 1951.02,2885.95 1951.02,2946.14 1970.24,2965.36 ; C15.1 1970.24,2965.36 ; 1976.3,3630 2003.39,3602.91 C9.1 C9.1@1992.82,3460.57 ; U1.35 2083.58,2488.9 2141.24,2431.24 ; v1(2090.67,2415) 2096.11,2420.44 2130.44,2420.44 2141.24,2431.24 ; v1(2140,2955) 2075.52,2955 2061.54,2968.98 1973.86,2968.98 1970.24,2965.36 ; v1(2150,2858.15) 2207.55,2800.6 2207.55,2797.55 ; v1(2150.98,3685) 2209.06,3685 C6.1@2210.35,3683.7 ; U1.47 2188.58,2768.58 2197.95,2777.95 2197.95,2787.95 2207.55,2797.55 ; C3.1 C3.1@2215.35,3916.3 ; v1(2245,4000) 2215.35,3970.35 C3.1@2215.35,3916.3 ; v1(2265,2525) 2171.24,2431.24 2141.24,2431.24 ; v1(2324.83,2704.83) 2324.83,2705.05 2275,2754.88 2275,2790.67 2258.52,2807.15 2217.15,2807.15 2207.55,2797.55 ; SW2.3 2595.34,2332.74 2239.75,2332.74 2141.24,2431.24 ; J9.04 4380,3885 J8.4 ; U4.20 4960,2520 J6.6 ; J10.2 5505,3102.3 J4.18 ; J3.SH4 1256.46,3597.32 J3.SH4@1260,3593.78
  Top Layer w11.81: C7.1 1665.35,3501.3 1714.06,3550 1796.65,3550 1845.35,3501.3 C8.1 1850.35,3500 1850.35,3678.7 1899.06,3630 1976.3,3630 C5.1@2025,3678.7 ; C5.1 C5.1@2025,3678.7 ; C10.1 2260.35,3501.3 2210.35,3551.3 2210.35,3683.7 2167.76,3641.1 2062.6,3641.1 C5.1@2025,3678.7 ; SW1.3 2820,1400.63 2820,2108.07 SW2.3 2760.91,2479.9 2817.4,2536.4 2817.4,2849.13 SW3.3 2835.04,2955.67 2835.04,3231.55 2895,3291.51 2895,3466.54 SW4.3 2832.4,3608.03 2832.4,4199.13 SW5.3 ; v1(4325,3390) 4585,3390 J8.4
  Bottom Layer w9.84: v1(1260,3500) 1260,3493.77 1235,3468.77 J2.04 1170,3005 1170,2735 J1.06 J1.05 ; v1(1613.88,3170) 1610,3166.12 1610,3110 v1(1705,3015) ; v1(1930.99,2405.74) 2045.99,2405.74 2050.91,2410.67 2086.34,2410.67 v1(2090.67,2415) ; v1(2140,2955) 2140,2879.02 2150,2869.02 v1(2150,2858.15) ; v1(2150.98,3685) 2346.1,3880.12 2346.1,3970 2316.1,4000 v1(2245,4000) ; v1(2265,2525) 2265,2533.04 2315,2583.04 2315,2643.53 2299.88,2658.65 2299.88,2673.55 2324.83,2698.5 v1(2324.83,2704.83) ; U4.20 4773.66,2843.66 4773.66,3491.34 J8.4 ; J10.2 5505,2940 J6.6 ; J4.18 J4.16 J4.14 J4.12 J4.10 J4.08 J4.06 J4.04 J4.02
  Bottom Layer w11.81: SW4.3 3651.42,3568.58 J7.4 3675.9,3525.9 3675.9,3489.04 3640.35,3453.49 3640.35,3416.51 3666.51,3390.35 v1@4324.65,3390.35
K: U3.16 U4.16 | length 934.8
  Bottom Layer w11.81: U3.16 4685,2341.83 4655.04,2371.79 4655.04,3116.2 4685,3146.16 U4.16
NetC9_2: C9.2 U2.4 | length 872
  Top Layer w9.84: U2.4 1387.99,3331.81 1396.26,3340.08 1406.1,3340.08 1425,3358.98 1506.85,3358.98 1511.77,3354.05 1546.07,3354.05 v1(1551.54,3348.58) ; v1(2110,3410) 2163.82,3410 2176.61,3422.8 C9.2
  Bottom Layer w9.84: v1(1551.54,3348.58) 1552.95,3350 2050,3350 v1(2110,3410)
NetD1_C: D1.C R3.1 | length 298.3
  Top Layer w11.81: R3.1 1758.54,4204.92 1823.62,4270 D1.C
NetD2_C: D2.C R4.1 | length 554.8
  Top Layer w11.81: R4.1 1996.01,4200 2055.97,4140.04 2242.64,4140.04 2329.29,4226.69 D2.C
NetJ1_03: J1.03 R2.2 | length 2888.5
  Top Layer w11.81: R2.2 v1(1555,4285)
  Bottom Layer w11.81: J1.03 1190,2430 1135,2375 1050,2375 1017.6,2407.4 1017.6,4302.6 1090,4375 1465,4375 v1(1555,4285)
NetJ3_2: J3.2 R5.2 | length 204.2
  Top Layer w9.84: J3.2 1268.27,3755.79 1298.58,3755.79 1396.3,3853.5 R5.2
NetJ3_3: J3.3 R6.2 | length 161.4
  Top Layer w9.84: J3.3 1307.28,3727.24 1336.89,3697.64 1360.16,3697.64 1376.3,3681.5 R6.2
OSCIN: C14.2 R8.2 U1.5 Y2.1 | length 1963.7
  Top Layer w9.84: v1(1535,3015) Y2.1@1623.5,3015 ; v1(1602.53,3547.92) 1602.53,3625.13 R8.2 ; Y2.1 Y2.1@1623.5,3015 ; v1(1885,2930) 1880.12,2925.12 1777.37,2925.12 1766.14,2913.9 1621.1,2913.9 1610,2925 1610,3001.5 Y2.1@1623.5,3015 ; U1.5 2024.53,2864.06 2024.54,2900.41 2049.02,2924.88 v1(2049.02,2926.38) ; v1(2319.94,3110.06) 2319.94,3194.7 C14.2
  Bottom Layer w9.84: v1(1535,3015) 1493.07,3056.93 1493.07,3237.01 1486.63,3243.45 1486.63,3368.31 1493.07,3374.75 1493.07,3438.45 v1(1602.53,3547.92) ; v1(1885,2930) 1931.52,2930 1970.49,2891.02 2007.88,2891.02 2043.23,2926.38 v1(2049.02,2926.38) ; v1@2046.12,2929.27 2051.91,2929.27 2232.7,3110.06 v1(2319.94,3110.06)
OSCOUT: C15.2 R8.1 U1.6 Y2.3 | length 1516.5
  Top Layer w9.84: v1(1595,3455) 1597.5,3452.5 1597.5,3302.18 v1(1602.34,3297.34) ; v1(1675,3590) 1682.68,3597.68 1682.68,3621.03 1737.6,3675.94 R8.1 ; v1(1705,3180) 1705,3179.17 1771.93,3112.24 Y2.3 ; v1(1966.11,2771.03) 1970.04,2771.03 2004.84,2805.83 U1.6
  Top Layer w11.81: v1(1714.65,3100) 1771.5,3100 Y2.3 ; v1(1750,2952.87) 1796.11,2952.87 1803.99,2945 1839.76,2945 1877.72,2982.95 1884.41,2982.95 1899.76,2998.31 C15.2
  Bottom Layer w9.84: v1(1595,3455) 1675,3535 v1(1675,3590) ; v1(1602.34,3297.34) 1602.34,3290.16 1705,3187.5 v1(1705,3180)
  Bottom Layer w11.81: v1(1714.65,3100) 1750,3064.65 1750,2945 1912.69,2782.31 1947.69,2782.31 1958.97,2771.03 v1(1966.11,2771.03)
Out3.3: C2.2 C3.2 C4.2 C5.2 C6.2 C10.2 C11.2 J1.01 J1.02 J2.01 J4.07 J4.09 J4.11 J10.1 R1.1 U2.5 | length 10526.8
  Top Layer w9.84: J1.01 J1.02 1090,2625 J2.01 1235,2812.1 1287.5,2864.6 1287.5,2902.62 1340,2955.12 1340,3155 1430,3245 ; R1.1 1482.6,4199.06 1450.51,4231.14 1346.98,4231.14 1283.62,4167.78 1081.94,4167.78 1018.58,4104.42 1018.58,3306.42 1080,3245 1430,3245 ; C11.2 1734.65,3278.7 1666.02,3210.08 1666.02,3151.3 1675.67,3141.66 1675.67,3082.83 1667.48,3074.65 1585.04,3074.65 1574.9,3084.78 1574.9,3269.66 1560,3284.56 1560,3285 1523.03,3321.97 U2.5 1460,3319.96 1460,3275 1430,3245 ; 2094.29,3725.71 2104.65,3736.06 C2.2@2104.65,3903.7 ; C2.2 C2.2@2104.65,3903.7 ; J4.11 J4.09 ; J4.07 J4.09 ; C2.2@2104.65,3903.7 2122.36,3885.98 2168.03,3885.98 2186.93,3867.09 2248.03,3867.09 2284.65,3903.7 C3.2 2284.65,4124.65 2313.98,4153.98 2363.7,4153.98 2694.72,4485 5050,4485 5612.18,3922.82 J4.09
  Top Layer w11.81: C11.2 1751.38,3301.73 1751.38,3366.04 1770,3384.67 v1(1770,3395) ; v1(1850,3750) 1857.31,3742.69 1868.25,3742.69 C4.2@1919.65,3691.3 ; C4.2 C4.2@1919.65,3691.3 ; C5.2 C5.2@2094.29,3691.3 ; C10.2 2329.65,3633.7 2279.65,3683.7 C6.2 2279.65,3696.3 2230.94,3745 2154.29,3745 2117.32,3708.03 2111.02,3708.03 C5.2@2094.29,3691.3 ; C4.2@1919.65,3691.3 1919.65,3724.65 1940,3745 2075,3745 2094.29,3725.71 C5.2@2094.29,3691.3
  Bottom Layer w9.84: J10.1 5605,3702.3 J4.09
  Bottom Layer w11.81: v1(1770,3395) 1770,3405.33 1753.7,3421.63 1753.7,3706.55 1797.15,3750 v1(1850,3750)
Out5: C7.2 C8.2 D1.A D2.A J3.1 J4.13 J4.15 J4.17 J6.5 J7.5 J8.5 U2.1 U2.3 U4.19 | length 11208.1
  Top Layer w11.81: J3.1 1284.02,3778.43 1315,3809.41 1315,3874.9 1290.21,3899.69 1123.24,3899.69 1095.83,3872.27 1095.83,3582.22 1258.04,3420 1386.02,3420 1395.28,3410.75 1395.28,3391.31 1406.54,3380.04 1443.46,3380.04 1454.72,3391.31 1454.72,3410.75 U2.1 1465.04,3415 v1(1540,3415) ; v1(1530.2,3255) 1522.89,3247.69 1502.2,3247.69 1396.14,3141.63 1396.14,2940.37 1365.04,2909.27 1365.04,2213.45 1503.49,2075 v1(1720,2075) ; v1(1710,3415) 1710,3423.7 1734.65,3448.35 C7.2@1734.65,3488.7 ; C7.2 C7.2@1734.65,3488.7 ; v1(1915,3585) 1915,3495.35 C8.2 1914.65,3488.7 1855.94,3430 1793.35,3430 C7.2@1734.65,3488.7 ; v1(2150,4180) 2113.58,4216.42 D1.A ; D2.A D1.A ; v1(2525,4460) 2303.58,4460 D1.A ; U4.19 4960,2620 5015,2620 ; J8.5 4905,3260 v1(4905,2965) ; v1(5065.06,2669.94) 5064.94,2669.94 5015,2620 ; J6.5 5015,2620
  Bottom Layer w11.81: v1(1530.2,3255) 1530.2,3303.29 1506.52,3326.97 1506.52,3360.08 1532.69,3386.25 1532.69,3407.69 v1(1540,3415) v1(1710,3415) ; v1(1720,2075) v1@1721.59,2076.59 ; v1(1915,3585) 2150,3820 v1(2150,4180) ; v1(2525,4460) 2660,4460 3529.65,3590.35 3692.78,3590.35 3729.65,3553.49 3729.65,3479.65 J7.5 J8.5 ; v1(4905,2965) 5065,2805 5065,2670 v1(5065.06,2669.94) ; J4.13 J4.15 J4.17 5991.3,3357.05 5991.3,2686.3 J6.5
PA2: J10.3 U1.12 | length 6611.9
  Top Layer w9.84: 1460,2895 1855.79,2895 1886.73,2864.06 U1.12
  Top Layer w11.81: v1(1405,2860) 1440,2895 1460,2895
  Bottom Layer w11.81: v1(1405,2860) 1410,2855 1410,2667.91 1337.44,2595.35 1337.44,2205.52 2052.96,1490 4580,1490 5405,2315 J10.3
PA3: J10.4 U1.13 | length 5605.7
  Top Layer w9.84: v1(1465,2790) 1466.73,2788.27 U1.13
  Bottom Layer w9.84: v1(1465,2790) 1429.88,2754.88 1429.88,2659.67 1357.32,2587.11 1357.32,2213.75 1664.19,1906.89 4357.13,1906.89 5305,2854.76 J10.4
PA8: J9.01 U1.29 | length 3310.9
  Top Layer w9.84: U1.29 1965.47,2631.13 1959.67,2636.93 1959.67,2685.1 1978.55,2703.98 2045.49,2703.98 2047.22,2703.98 2063.62,2687.57 v1(2063.62,2638.82) ; v1(2305.21,2877.42) 2297.52,2885.1 2297.52,2915.61 2270,2943.13 2270,3005 v1(2475,3210) ; v1(2955,3405) 3428.66,3878.66 3663.66,3878.66 J9.01
  Bottom Layer w9.84: v1(2063.62,2638.82) 2068.5,2633.94 2108.31,2633.94 2122.25,2620 2184.89,2620 2341.54,2776.65 2341.54,2838.7 2305.21,2875.04 v1(2305.21,2877.42) ; v1(2475,3210) 2699.88,3434.88 2844.6,3434.88 2874.48,3405 v1(2955,3405)
PA9: J9.02 U1.30 | length 3275.8
  Top Layer w9.84: U1.30 1985.16,2574.72 1985.06,2574.82 1985.06,2611.14 1990.96,2617.05 1990.96,2645.4 v1(1998.65,2653.08) ; v1(2302.36,2818.43) 2377.75,2893.82 2377.75,2962.75 v1(2475,3060) ; v1(2875,3215) 3438.66,3778.66 4013.66,3778.66 4180,3945 J9.02
  Bottom Layer w9.84: v1(1998.65,2653.08) 1998.82,2653.08 2040,2694.26 2055.99,2694.26 2076.73,2715 2253.16,2715 2297.83,2759.67 2297.83,2813.9 v1(2302.36,2818.43) ; v1(2475,3060) 2630,3215 v1(2875,3215)
PA10: J9.03 U1.31 | length 4048.9
  Top Layer w9.84: v1(1966.74,2454.74) 1970.68,2454.74 2004.84,2488.9 U1.31 ; v1(2065,2275) 2110,2230 2404.13,2230 2424.19,2209.94 v1(2435.06,2209.94) ; v1(2830,2360) 2837.28,2367.28 2837.28,2617.35 3233.98,3014.04 3233.98,3253.24 3659.4,3678.66 4003.66,3678.66 4280,3955 J9.03
  Bottom Layer w9.84: v1(1966.74,2454.74) 1966.62,2454.62 1924.74,2454.62 1886.19,2416.06 1886.19,2383.81 1930.95,2339.05 2000.95,2339.05 v1(2065,2275) ; v1(2435.06,2209.94) 2499.73,2274.61 2499.73,2303.01 2556.73,2360 2659.88,2360 2663.86,2363.98 2696.14,2363.98 2700.12,2360 v1(2830,2360)
PA11: R5.1 U1.32 | length 2980.9
  Top Layer w9.84: v1(1470,4025) 1535,4025 1583.7,3976.3 R5.1 ; v1(1528.96,2123.96) 1913.96,2123.96 1984.76,2194.76 1984.76,2417.64 2024.53,2457.4 U1.32
  Bottom Layer w9.84: v1(1470,4025) 1470,3378.4 1467.74,3376.14 1467.74,2879.11 1528.96,2817.89 v1(1528.96,2123.96)
PA12: R6.1 R7.2 U1.33 | length 3276.7
  Top Layer w9.84: v1(1390,3530) 1462.36,3602.36 1547.56,3602.36 1563.7,3618.5 R6.1 1570,3656.3 v1(1570,3755) ; R7.2 1680,3919.29 v1(1680,3855) ; U1.33 2044.21,2450.36 2016.1,2422.25 2016.1,2268.78 2044.21,2240.67 2044.21,2200.79 2044.21,2069.21 2063.5,2049.92 v1(2063.5,2043.36)
  Bottom Layer w9.84: v1(1390,3530) 1390,3078.44 1398.98,3069.46 1398.98,2921.14 1503.98,2816.14 1503.98,2689.54 1376.22,2561.78 1376.22,2221.58 1561.78,2036.02 1759.56,2036.02 1797.51,2073.98 2032.89,2073.98 v1(2063.5,2043.36) ; v1(1570,3755) 1575,3755 1675,3855 v1(1680,3855)
PB1: J6.2 U1.19 | length 5175.4
  Top Layer w9.84: v1(1773.59,2670.55) 1773.98,2670.16 U1.19 ; v1(2885,2455) 5921.75,2455 5968.66,2501.91 5968.66,2838.09 5931.2,2875.55 5931.2,2913.8 J6.2
  Bottom Layer w9.84: v1(1773.59,2670.55) 1769.45,2670.55 1731.02,2708.98 1688.86,2708.98 1664.06,2684.18 1664.06,2566.31 1740.25,2490.12 1942.52,2490.12 1946.12,2493.72 2102.62,2493.72 2152.04,2444.29 2298.43,2444.29 2358.12,2503.98 2426.14,2503.98 2475.12,2455 v1(2885,2455)
PB5: SW1.1 U1.41 | length 1710.8
  Top Layer w9.84: U1.41 2202.8,2650.47 2263.02,2590.25 2339.87,2590.25 2448.98,2481.14 2448.98,2448.86 2426.14,2426.02 2379.54,2426.02 2369.24,2436.32 v1(2358.38,2436.32) ; v1(2299.94,2185.06) 2299.94,1530.69 SW1.1
  Bottom Layer w9.84: v1(2299.94,2185.06) 2358.38,2243.5 v1(2358.38,2436.32)
PB6: SW2.1 U1.42 | length 1090.9
  Top Layer w9.84: U1.42 2214.47,2670.16 2275.47,2609.15 2406.81,2609.15 2462.66,2665 2570.12,2665 2680,2555.12 v1(2680,2325)
  Bottom Layer w9.84: SW2.1 2655.15,2317.32 2672.32,2317.32 v1(2680,2325)
PB7: SW3.1 U1.43 | length 564.7
  Top Layer w9.84: U1.43 2200.28,2689.84 2200.44,2689.69 2221.66,2689.69 2283.3,2628.05 2363.47,2628.05 2421.68,2686.27 2421.68,2798.22 SW3.1
PB8: SW4.1 U1.45 | length 1238.5
  Top Layer w9.84: U1.45 2219.47,2729.21 2219.53,2729.16 2245.38,2729.16 2308.7,2665.85 2347.81,2665.85 2363.81,2681.84 2363.81,2721.19 2343.73,2741.27 2343.73,2833.08 2517.95,3007.3 2517.95,3307.3 2493.58,3331.67 2493.58,3525.12 SW4.1
PB9: SW5.1 U1.46 | length 1729.3
  Top Layer w9.84: U1.46 2205.57,2748.9 2224.81,2768.14 v1(2235.67,2768.14) ; v1(2375,4115) 2479.02,4219.02 2507.48,4219.02 SW5.1
  Bottom Layer w9.84: v1(2235.67,2768.14) 2235.53,2768.28 2235.53,2860.81 2271.22,2896.5 2271.22,2909.74 2281.79,2920.31 2282.04,2920.31 2294.46,2932.73 2322.85,2932.73 2375.12,2985 2375.12,3073.39 2383.9,3082.17 2383.9,4095.24 2375,4104.13 v1(2375,4115)
PB10: J6.3 U1.21 U4.17 | length 4997.4
  Top Layer w9.84: v1(1705,2670) 1715.87,2670 1727.13,2658.73 1730.28,2658.73 1758.23,2630.79 U1.21
  Top Layer w11.81: v1(3010,2720) 3365,3075 U4.17 4960,2820 J6.3
  Bottom Layer w11.81: v1(1705,2670) 1705,2659.67 1683.94,2638.6 1683.94,2574.55 1748.49,2510 1934.28,2510 1948.14,2523.86 2180.12,2523.86 2239.8,2464.17 2290.2,2464.17 2349.88,2523.86 2434.38,2523.86 2448.24,2510 2931.51,2510 3010,2588.49 v1(3010,2720)
PB11: J6.4 U1.22 U4.18 | length 4685.6
  Top Layer w9.84: v1(1723.9,2610) 1725,2611.1 U1.22
  Top Layer w11.81: v1(2920,2555) 3340,2975 U4.18 4960,2720 J6.4
  Bottom Layer w11.81: v1(1723.9,2610) 1731.2,2602.69 1731.2,2583.8 1760,2555 2178.49,2555 2248.45,2485.04 2281.55,2485.04 2351.51,2555 v1(2920,2555)
PB13: J7.2 U1.26 | length 2934.3
  Top Layer w9.84: U1.26 1906.42,2554.17 1918.27,2566.02 1933.05,2566.02 1938.82,2571.79 1938.82,2631.01 1920.7,2649.13 v1(1920.7,2660) ; v1(2330,2995) 2336.99,2995 2471.99,3130 v1(2478.98,3130) ; v1(3855,3639.68) 3860,3634.68 3860,3355.39 v1(3865,3350.39)
  Bottom Layer w9.84: v1(1920.7,2660) 1928.38,2667.68 1928.38,2698.38 1943.16,2713.16 2045.77,2713.16 2151.79,2819.17 2167.17,2819.17 2252.32,2904.33 2252.32,2919.71 2327.61,2995 v1(2330,2995) ; v1(2478.98,3130) 2696.93,3347.95 3862.56,3347.95 v1(3865,3350.39) ; J7.2 3770,3735 3855,3650 v1(3855,3639.68)
PB15: J7.3 U1.28 | length 3076.1
  Top Layer w9.84: v1(1865,2450) 1906.88,2450 1945.79,2488.9 U1.28
  Top Layer w11.81: v1(2087.05,2120) 2089.55,2117.5 2171.48,2117.5 v1(2173.98,2115) ; v1(2270,2390) 2435,2390 2580,2535 v1(2580,2594.96) ; v1(2900,3130) 2900,3135 3175,3410 v1(3175,3415) ; v1(3460,3415) 3462.5,3415 3682.5,3635 J7.3
  Bottom Layer w11.81: v1(1865,2450) 1865,2445.42 1837.09,2417.5 1837.09,2369.96 v1(2087.05,2120) ; v1(2173.98,2115) 2173.98,2123.98 2270,2220 v1(2270,2390) ; v1(2580,2594.96) 2580,2810 v1(2900,3130) ; v1(3175,3415) v1(3460,3415)
PC13: R4.2 U1.2 | length 2005.3
  Top Layer w9.84: R4.2 1821.46,4195.08 1921.54,4095 v1(2225,4095) ; U1.2 2083.58,2871.1 2109.61,2897.13 2180.46,2897.13 2203.8,2920.47 v1(2213.35,2920.47)
  Bottom Layer w9.84: v1(2213.35,2920.47) 2213.35,2931.34 2272.13,2990.12 2272.13,3018.97 2306.03,3052.87 2327.87,3052.87 2365,3090 2365,4065 2335,4095 v1(2225,4095)
PC14: C12.2 U1.3 Y1.1 | length 1530.7
  Top Layer w9.84: v1(1535,2935) 1496.02,2973.98 1496.02,3031.14 1514.45,3049.57 1514.45,3085.24 Y1.1 1529.21,3084.25 1543.98,3069.49 1563.47,3069.49 1577.21,3055.75 1806.06,3055.75 1833.15,3082.83 1833.15,3151.48 1795,3189.63 1795,3219.21 1822.71,3246.93 1885,3246.93 1920.24,3211.69 C12.2 ; v1(2024.83,2761.85) 2031.44,2761.85 2063.9,2794.31 U1.3
  Bottom Layer w9.84: v1(1535,2935) 1641.02,2828.98 1765.04,2828.98 1861.96,2732.06 1988.06,2732.06 2017.85,2761.85 v1(2024.83,2761.85)
PC15: C13.2 U1.4 Y1.2 | length 1329.6
  Top Layer w9.84: Y1.2 1430.79,3115.75 1445.55,3130.51 1479.07,3130.51 1484.84,3136.28 1484.84,3164.84 1502.9,3182.9 1524.65,3182.9 v1(1532.05,3190.29) ; U1.4 2044.21,2872.24 2059.38,2887.4 2073.17,2887.4 2101.79,2916.02 2156.14,2916.02 2178.98,2938.86 2178.98,3006.02 2130,3055 2130,3185.24 C13.2 2103.9,3178.66 2103.9,3149.76 2090,3135.87 v1(2090,3125)
  Bottom Layer w9.84: v1(1532.05,3190.29) 1579.05,3190.29 1597.73,3208.98 1630.02,3208.98 1659.44,3179.56 1659.44,3170.44 1688.86,3141.02 1728.74,3141.02 1744.77,3125 v1(2090,3125)
R/W: U3.5 U4.5 | length 910
  Bottom Layer w11.81: U3.5 U4.5
RESET: C1.1 R1.2 SW6.3 SW6.4 U1.7 | length 2529.4
  Top Layer w9.84: U1.7 1985.16,2925.16 v1(1990,2930)
  Top Layer w11.81: SW6.3 SW6.4 ; R1.2 1407.4,4180.94 1317.95,4091.5 SW6.4 ; v1(1793.66,3690) 1793.66,3765.48 1850,3821.82 C1.1 ; 1850,3870 1795.04,3815.04 1663.45,3815.04 1635,3843.49 1635,3975 1523.58,4086.42 SW6.4
  Bottom Layer w11.81: v1(1793.66,3690) 1875.04,3608.62 1875.04,3568.45 1945.99,3497.5 2079.01,3497.5 2149.96,3426.55 2149.96,3089.96 v1(1990,2930)
RS: U3.4 U4.4 | length 910
  Bottom Layer w10: U3.4 U4.4
SWCLK: J2.03 U1.37 | length 2845.3
  Top Layer w9.84: J2.03 1024.65,2759.65 1024.65,2468.9 1043.9,2449.65 1068.63,2449.65 1568.27,1950 1978.62,1950 v1(1982.76,1945.86) ; U1.37@2153.84,2571.73 2179.06,2571.73 2179.43,2571.36 2317.11,2571.36 2402.32,2486.15 2402.32,2472.68 v1(2410,2465)
  Bottom Layer w9.84: v1(1982.76,1945.86) 1986.89,1950 2120,1950 2410,2240 v1(2410,2465)
SWDIO: J2.02 U1.34 | length 2325
  Top Layer w9.84: J2.02 1043.54,2678.54 1043.54,2476.73 1051.73,2468.54 1076.46,2468.54 1550,1995 v1(1950,1995) ; U1.34 2063.9,2443.35 2062.32,2441.77 2035,2414.43 2035,2395 2065.5,2364.5 2093.08,2364.5 v1(2100.76,2356.81)
  Bottom Layer w9.84: v1(1950,1995) 1953.98,1991.02 2066.29,1991.02 2113.98,2038.71 2113.98,2088.86 2135,2109.88 2135,2292.16 2108.45,2318.72 2108.45,2349.13 v1(2100.76,2356.81)
VDD: U3.2 U4.2 | length 917.1
  Bottom Layer w11.81: U4.2@3280,3240 U4.2 U3.2
VO: U3.3 U4.3 | length 910
  Bottom Layer w10: U3.3 U4.3
VSS: U3.1 U4.1 | length 910
  Bottom Layer w11.81: U3.1 U4.1
pads on no net: J1.04 J4.01 J4.03 J4.05 J6.1 J7.1 J8.1 J8.2 J8.3 J10.5 SW1.2 SW1.4 SW2.2 SW2.4 SW3.2 SW3.4 SW4.2 SW4.4 SW5.2 SW5.4 U1.1 U1.10 U1.11 U1.14 U1.15 U1.16 U1.17 U1.18 U1.20 U1.25 U1.27 U1.38 U1.39 U1.40 U3.

## Polygon pours and split planes (outlines as drawn)
GND on Bottom Layer "GND" (solid, pour order 0): 875,750 cw(c875,850) 775,850 775,4550 cw(c875,4550) 875,4650 6075,4650 cw(c6075,4550) 6175,4550 6175,850 cw(c6075,850) 6075,750

## Silkscreen, mask and mechanical layers (free items; w line width, h text height)
Mechanical 1:
  lines w39.37: 740,725 ccw(c790,725) 790,675 3705,675 6190,675 ccw(c6190,725) 6240,725 6240,4645 ccw(c6190,4645) 6190,4695 790,4695 ccw(c790,4645) 740,4645 740,725

## Text inside footprints (layer, text, board x,y; h text height)
J3: Mechanical 13 "PCB EDGE" at 1114.72,3552.05 h50 r270